# Altium PCB logi-cam.PcbDoc
Units mil, origin at the board's own origin, x right, y up, seen from the top; angles counter-clockwise.
Board outline 1699 x 1365 mil, 2 copper layers (Top Layer, Bottom Layer); 21 components, 23 nets, 97 pads, 28 vias.
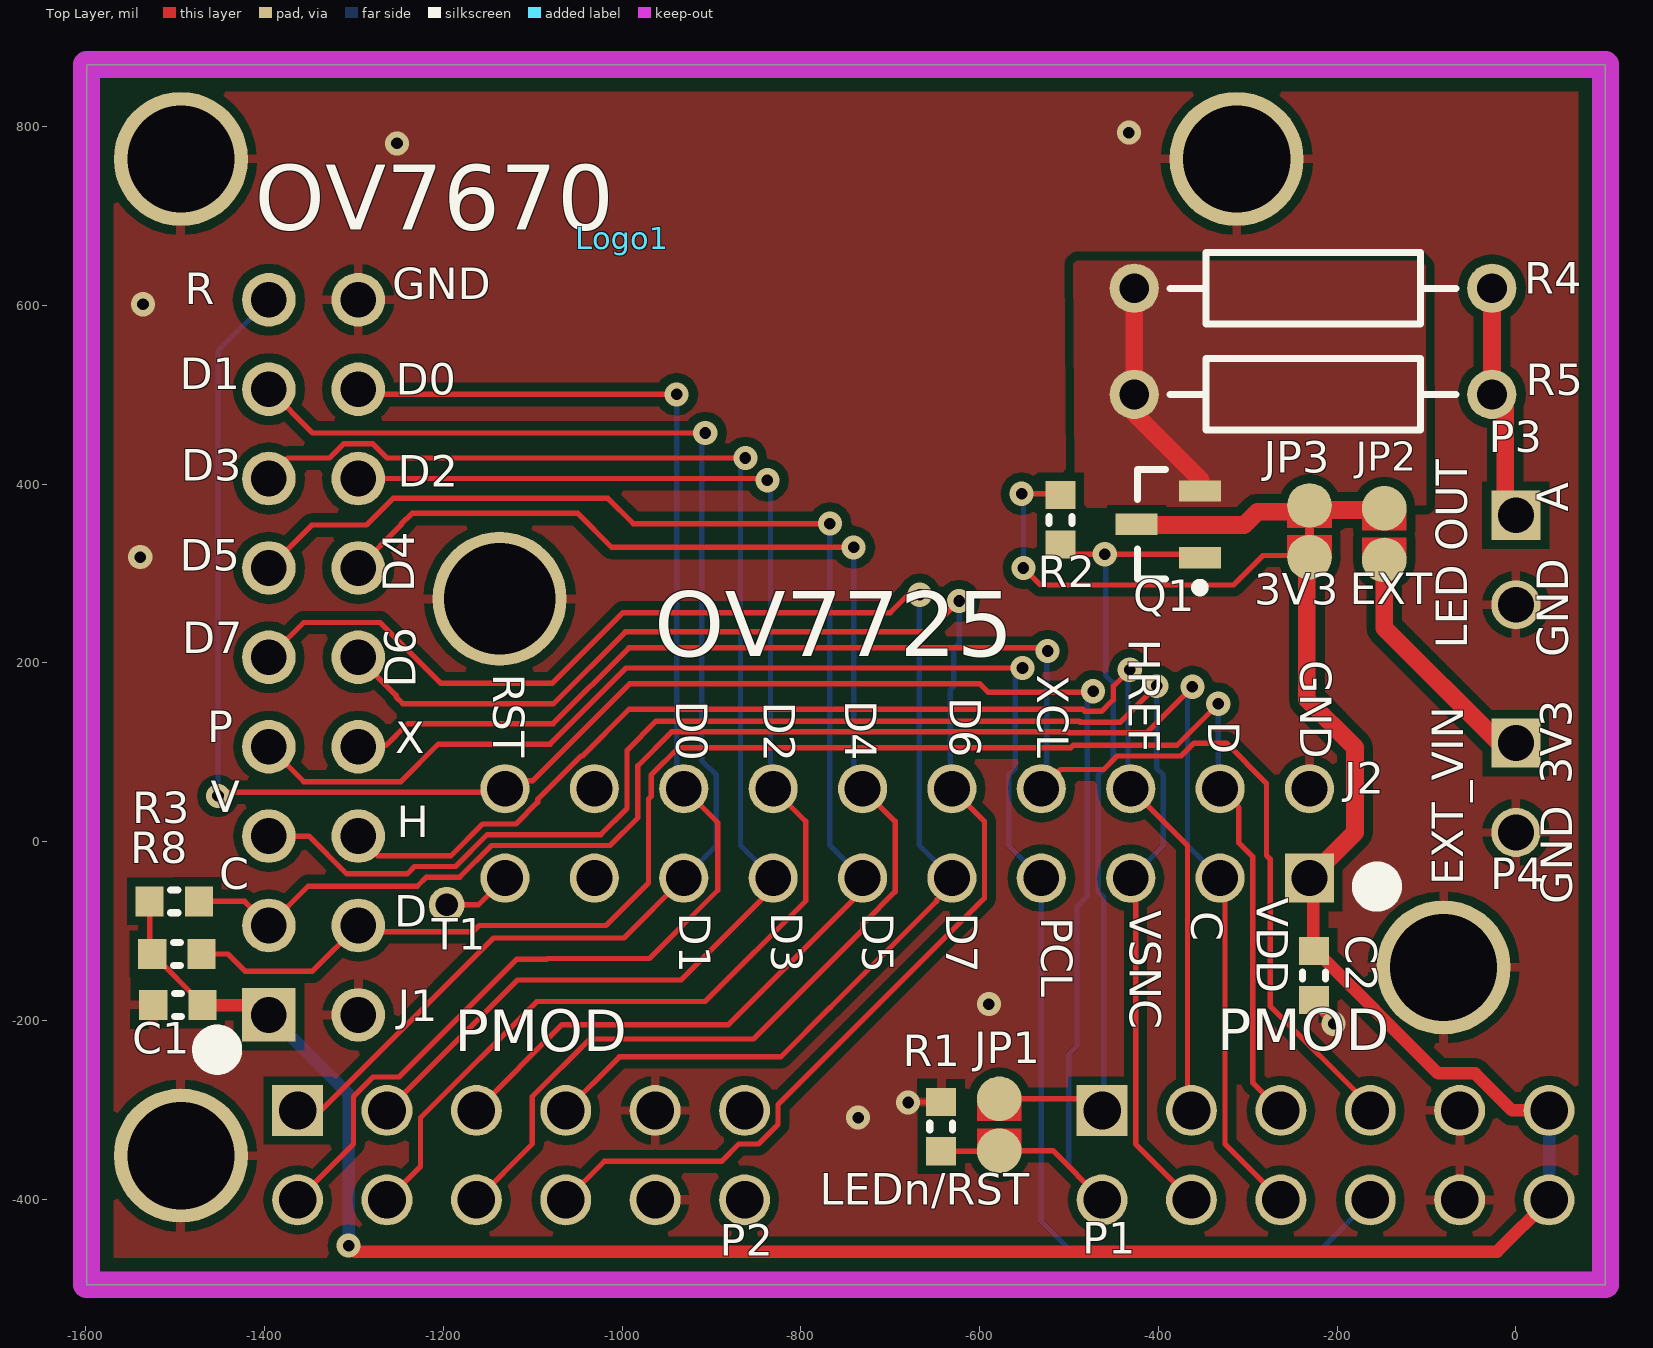
[diagram p0: Top Layer view]
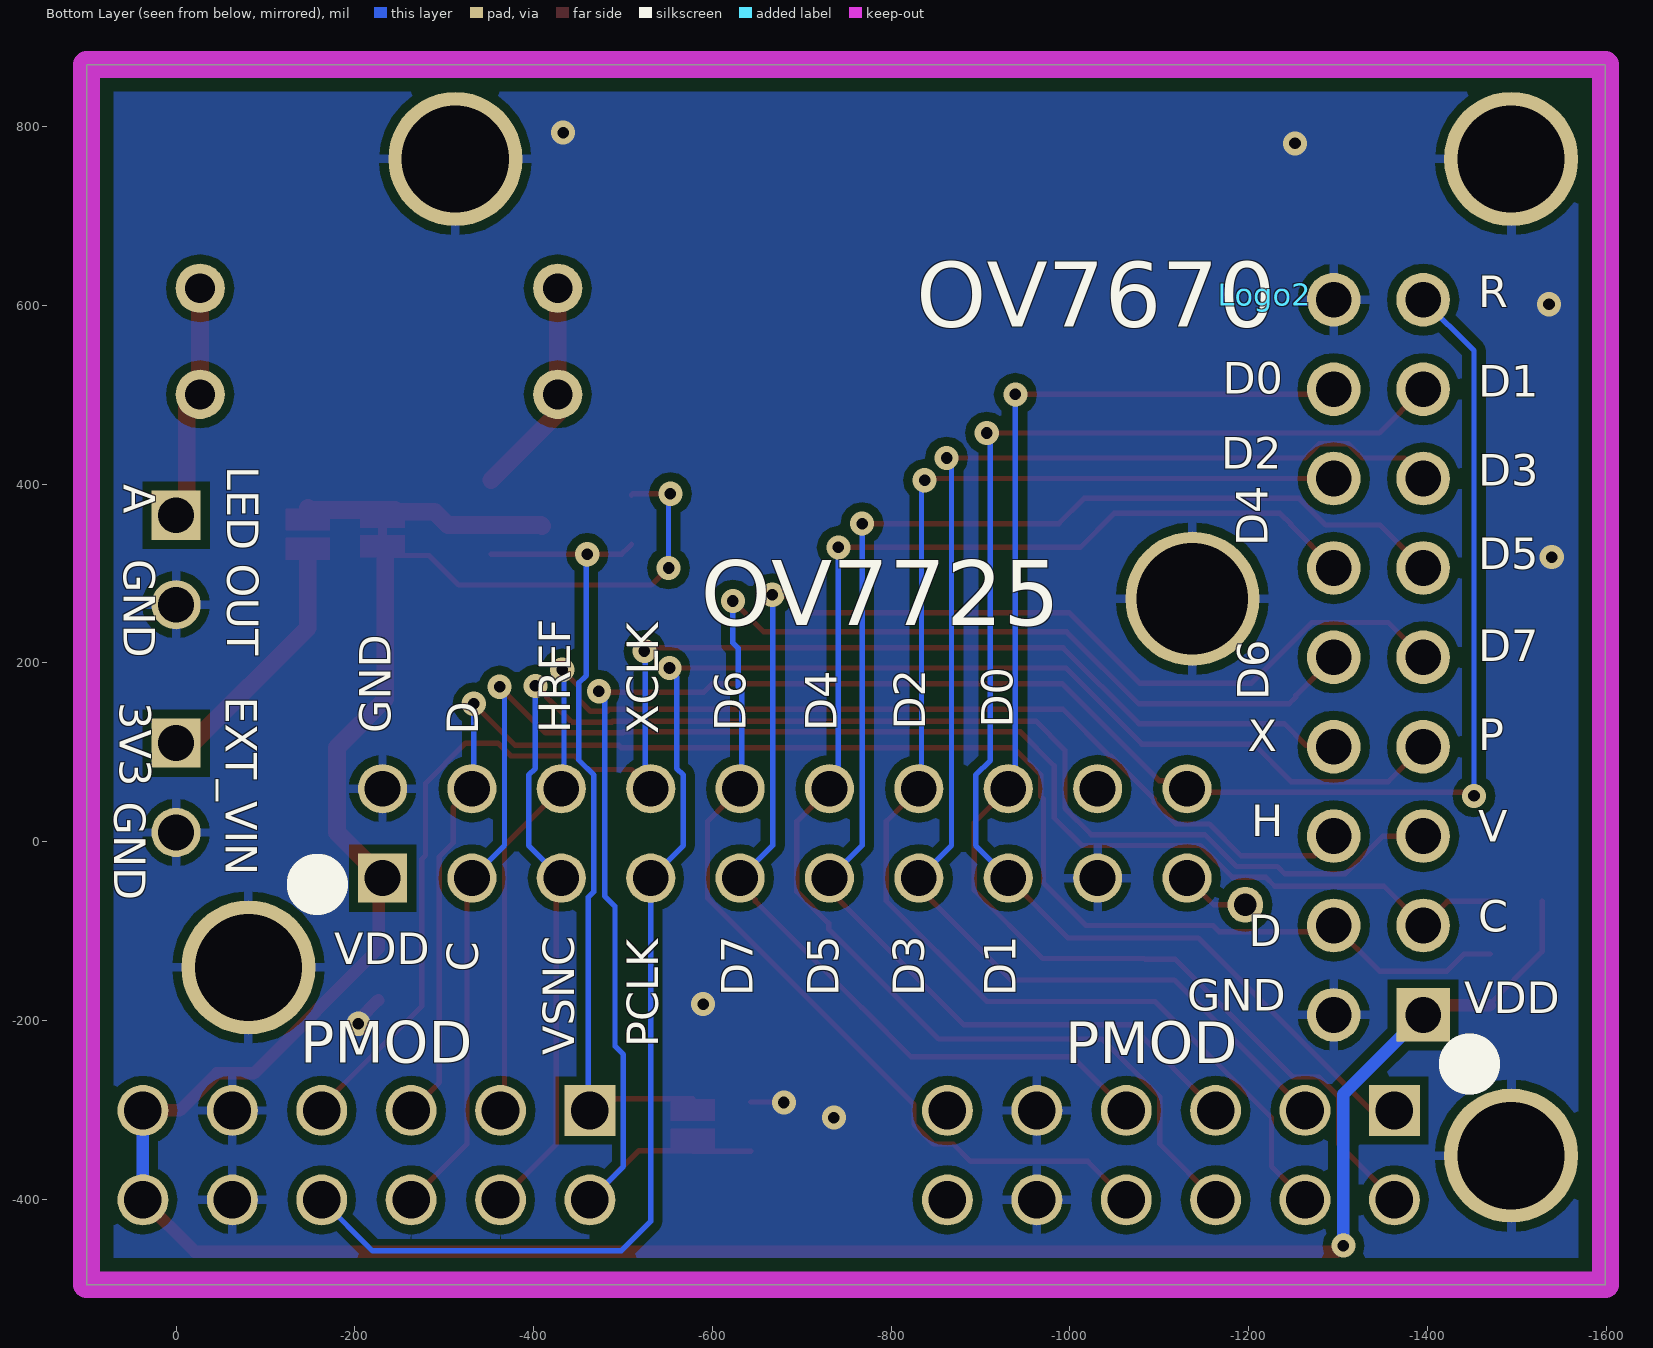
[diagram p1: Bottom Layer view, seen from below]
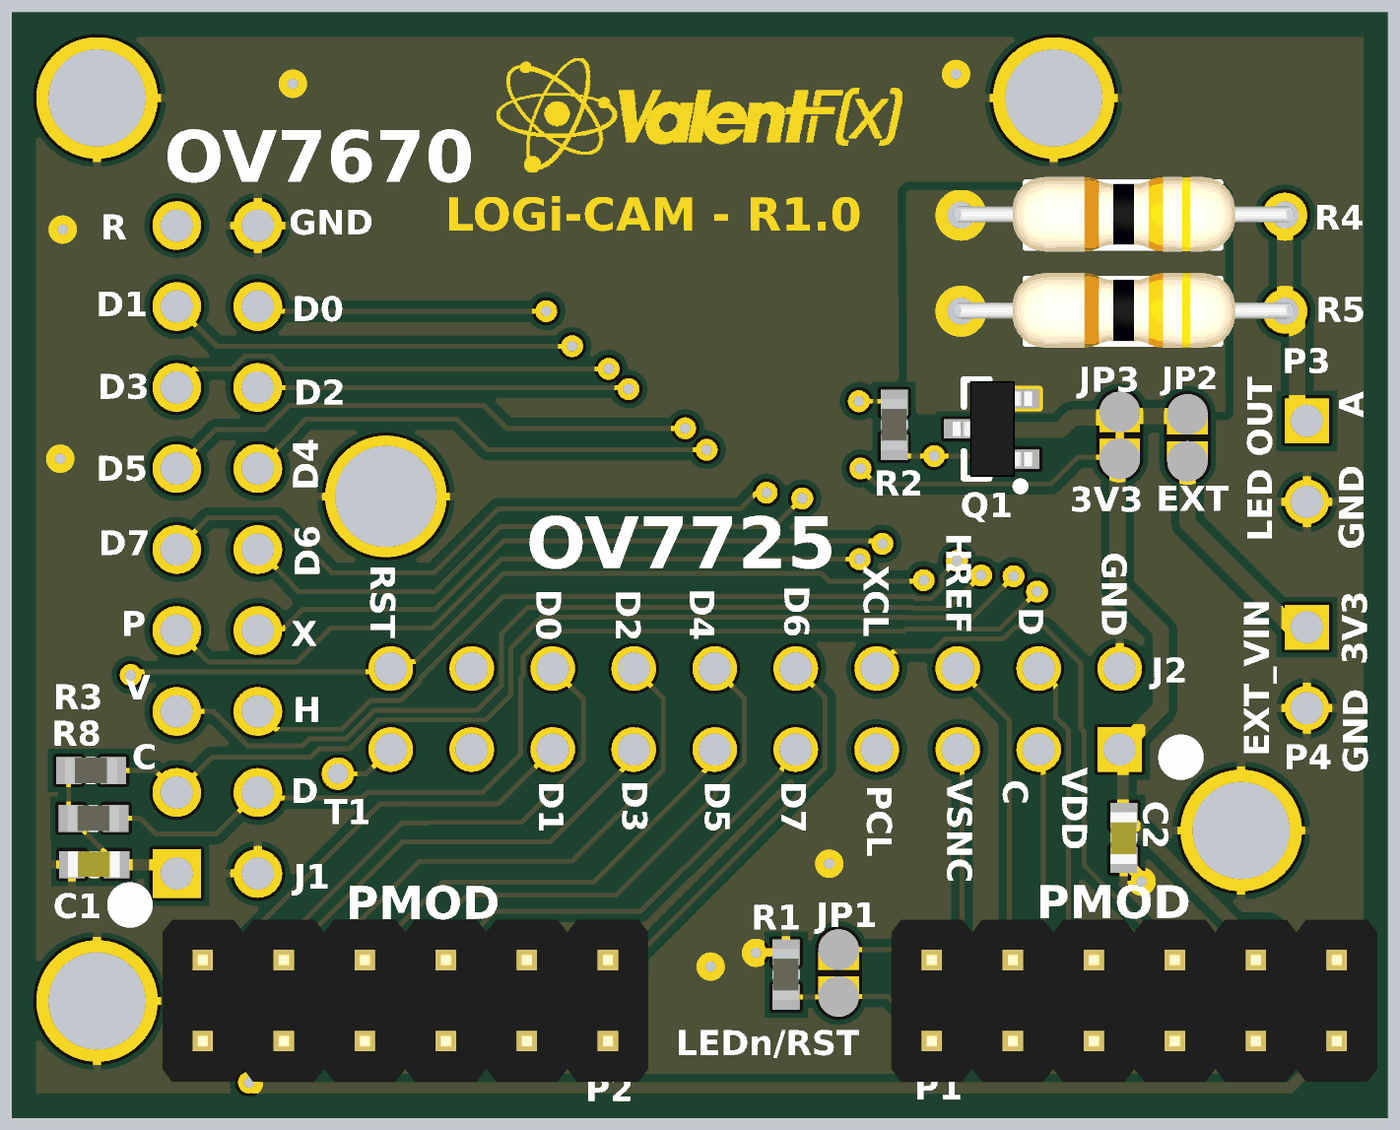
[diagram p2: 3D render of the assembled board from above, using the file's embedded part models]

## Layer stack, top to bottom
Top Solder: solder mask 0.4, Solder Resist, Dk 3.5
Top Layer: signal copper 1.4
Dielectric1: core 12.6, FR-4, Dk 4.8
Bottom Layer: signal copper 1.4
Bottom Solder: solder mask 0.4, Solder Resist, Dk 3.5

## Board outline
-1599,-495.83 100,-495.83 100,869.17 -1599,869.17

## Design rules (kind name [scope] priority, off if disabled: settings)
Clearance Keepout [onlayer('keep-out layer')] p1: gap=15
Clearance POLY_IN_BGA [(WithinRoom('BGA_INNER'))] p2: gap=6
Clearance POLY_TO_POLY [inpoly] p3: gap=10
Clearance [All] p4: gap=6
FabricationTestPointUsage TestPointUsage [All] p1: valid=0 allowmultiple=FALSE
FabricationTestpoint Testpoint [All] p1: side=3 testpointundercomponent=TRUE minsize=40 maxsize=100 preferedsize=60 minholesize=0 maxholesize=40 preferedholesize=32 testpointgrid=1 allowsidetop=TRUE allowsidebottom=TRUE usegrid=TRUE gridtolerance=0.01
PlaneClearance [All] p1: clearance=10
PolygonConnect POLY_Q [(ObjectKind = 'Poly') And (Name = 'Q_POUR')] p1: connectstyle=Direct reliefconductorwidth=10 reliefentries=4 polygonreliefangle="90 Angle" airgapwidth=10
PolygonConnect "via connect" [isvia] p2: connectstyle=Direct reliefconductorwidth=10 reliefentries=4 polygonreliefangle="90 Angle" airgapwidth=10
PolygonConnect [All] p3: connectstyle=Relief reliefconductorwidth=10 reliefentries=4 polygonreliefangle="90 Angle" airgapwidth=10
RoutingVias [All] p1: holewidth=13 width=27 viastyle="Through Hole" minholewidth=13 minwidth=27 maxholewidth=28 maxwidth=50
SilkToSolderMaskClearance SilkscreenOverComponentPads [IsPad] p1: minsilkscreentomaskgap=10 clearancetoexposedcopper=TRUE
SolderMaskExpansion VIA [isvia and not(locked)] p1: expansion=-100
SolderMaskExpansion SolderMaskExpansion_1 [All] p2: expansion=4
Width [All] p1: maxlimit=20 minlimit=6 preferedwidth=14
25 further rules are at their usual default settings.

## Classes and differential pairs
component class logi-cam-top: Cam1

## Components (designator, comment, footprint, x,y, rotation, side; value= is the part's Value field where it differs from the comment)
C1 ".1uF" C0603 -1497,-182.83 r180 top
C2 ".1uF" C0603 -226,-149.83 r270 top
J1 "OV7670 CAM HEADER" "HEADER_9x2_40_100 1-3-5 THRU DIP" -1395.16,-193.87 r90 top
J2 "OV7725 CAM HEADER" "HEADER_10x2_40_100 1-3-5 THRU DIP" -231,-40.83 r180 top locked
JP1 "Solder Jumper" SOLDER_JUMPER -578,-287.83 r90 top
JP2 "Solder Jumper" SOLDER_JUMPER -147.36,315 r270 top
JP3 "Solder Jumper-NC" SOLDER_JUMPER-NC -231,318 r270 top net-tie
Logo1 "Valent Logo 500" VALENTFX_500-SolderMask -1000,675 r0 top
Logo2 "Valent Logo 750" VALENTFX_750-SOLDERMASK-BOT -1217.7,612 r180 bottom
P1 "2X6 .1\" HEADER MALE" "PMOD HEADER - Male Vertical" -463,-300.83 r180 top
P2 "2X6 .1\" HEADER MALE" "PMOD HEADER - Male Vertical" -1363,-300.83 r180 top
P3 "Header2" "HEADER_2_40_100 THRU SIP" 0,365 r270 top
P4 "Header2" "HEADER_2_40_100 THRU SIP" 0,110.17 r270 top
Q1 "Si2347DS-T1-GE3" sot-23 -389,355 r180 top
R1 "10k" R0603 -643,-318.83 r90 top
R2 "10k" R0603 -509.5,360 r90 top
R3 "10k" R0603 -1501,-66.83 r0 top
R4 "Res2" AXIAL-0.4 -227,619 r0 top
R5 "10 Ohm 1/4W" AXIAL-0.4 -227,500.33 r0 top
R8 "10k" R0603 -1498,-125.83 r0 top
T1 "Test Point" "Tp 25-40" -1196.2,-70.68 r0 top

## Footprints (in the part's own frame and the unit in brackets; to place one, negate y for a bottom-side part, rotate by r counter-clockwise, add the part's x,y. Pads: shape width x height; smd on the part's side, far side on the other; paste and mask are expansions set on the pad)
AXIAL-0.4 [mm] "Axial Device, Thru-Hole; 2 Leads; 0.4 in Pin Spacing"
  round 1.4 hole 0.85: 1(-5.08,0) 2(5.08,0)
  silkscreen extent -4.06,-1.02 4.06,1.02, body extent -5.32,-1.14 5.37,1.19, height 2.44
C0603 [mm] "0603 Generic"
  rect 0.8x0.85 smd: 1(-0.7,0) 2(0.7,0)
  silkscreen extent -0.1,-0.33 0.1,0.33, body extent -0.8,-0.42 0.82,0.4, height 0.46
"HEADER_2_40_100 THRU SIP" [mil]
  rect 55x55 hole 40: 1(0,0)
  round 55 hole 40: 2(100,0)
"HEADER_9x2_40_100 1-3-5 THRU DIP" [mil]
  rect 60x60 hole 40: 1(0,0)
  round 60 hole 40: 2(0,-100) 3(100,0) 4(100,-100) 5(200,0) 6(200,-100) 7(300,0) 8(300,-100) 9(400,0) 10(400,-100) 11(500,0) 12(500,-100) 13(600,0) 14(600,-100) 15(700,0) 16(700,-100) 17(800,0) 18(800,-100)
"HEADER_10x2_40_100 1-3-5 THRU DIP" [mil]
  rect 55x55 hole 40: 1(0,0)
  round 55 hole 40: 2(0,-100) 3(100,0) 4(100,-100) 5(200,0) 6(200,-100) 7(300,0) 8(300,-100) 9(400,0) 10(400,-100) 11(500,0) 12(500,-100) 13(600,0) 14(600,-100) 15(700,0) 16(700,-100) 17(800,0) 18(800,-100) 19(900,0) 20(900,-100)
"PMOD HEADER - Male Vertical" [mil] "68021-212HLF"
  rect 57x57 hole 42: 1(0,0)
  round 57 hole 42: 2(-100,0) 3(-200,0) 4(-300,0) 5(-400,0) 6(-500,0) 7(0,100) 8(-100,100) 9(-200,100) 10(-300,100) 11(-400,100) 12(-500,100)
  body extent -550,-50 50,150, height 335
R0603 [mm] "0603 Generic"
  rect 0.8x0.85 smd: 1(-0.7,0) 2(0.7,0)
  silkscreen extent -0.1,-0.33 0.1,0.33, body extent -0.81,-0.41 0.81,0.41, height 0.46
SOLDER_JUMPER [mil]
  round 50 smd: 1(0,0) 2(-58,0)
  Top Layer region: 0.09,25.01 -24.91,25.01 -24.91,-24.99 0.09,-24.99
  Top Layer region: -32.91,25.01 -57.91,25.01 -57.91,-24.99 -32.91,-24.99
SOLDER_JUMPER-NC [mil]
  round 50 smd: 1(0,0) 2(-58,0)
  Top Layer region: 0.09,25 -24.91,25 -24.91,-25 0.09,-25
  Top Layer region: -32.91,25 -57.91,25 -57.91,-25 -32.91,-25
  Top Layer lines w10: 0,0 -50,0
sot-23 [mm] "SOT-23"
  rect 1.2x0.6 smd: 1(-0.9,0.95) 2(-0.9,-0.95) 3(0.9,0)
  silkscreen extent -1.03,-1.55 0.87,1.92, body extent -1.27,-1.5 1.23,1.5, height 1.07
"Tp 25-40" [mil]
  round 40 hole 25: 1(0,0)
VALENTFX_500-SolderMask [mil]
VALENTFX_750-SOLDERMASK-BOT [mil]

## Part data
C1 C2: library part "C0603 - C1608X7R1E104MT", ".10uF X7R 20% (MLCC) - SMD/SMT 0603 25volts"
J1: library part "CAM - OV7670", "CONN HEADER FMAL 18PS .1\" DL GOLD"
J2: library part "CAM - 0V7725", "CONN HEADR FMALE 20 POS .1\" DL AU"
JP1 JP2 JP3: "Solder/Configuration Jumper"
P1 P2: library part "P-MOD - PRPC006DAAN-RC", "CONN HEADER .100\" DUAL STR 12 POS"
P3 P4: "Header 2 pin"
Q1: library part "PMOS - Si2347DS-T1-GE3", "MOSFET -30V .042Ohm@10V 5A P-Ch G-III"
R1 R2 R3 R8: library part "R0603 - CRCW060310K0FKEA", "10k Thick Film Resistors - SMD 1/10watt 10Kohms 1%"
R4: "1/4W .4 Axial"
R5: library part "AX_25 - MF1/4DCT52R10R0F2", "Metal Film Resistors - Through Hole 10ohms 1% 100PPM"
T1: library part "Test Point 2", "Test Point Smaller Symbol"

## Free pads (board coordinates)
  round 150 hole 120: MT(-1493.58,-351.35) MT(-1493.58,763.61) MT(-312.48,763.61) MT(-81,-140.83)
  round 150 hole 125: MT(-1137,271.67)

## Via types
v1: diameter 27, hole 13, Top Layer to Bottom Layer, 28 vias

## Nets (pads, with @x,y where several pads share a name; then routed paths per layer and width w, separated by ;. In a path a pad name is that pad's centre, name@x,y a point inside that pad or via, vN(x,y) a via of type N, cw(c..) or ccw(c..) an arc to the next point about the centre after c; other vN are vias at no path point)
3V3: C1.1 C2.1 J1.1 J2.1 JP3.1 P1.6 P1.12 R2.2 R3.1 R8.1 | length 3256
  Top Layer w6: R3.1 -1528.56,-122.83 R8.1 -1469.44,-181.94 C1.1 ; v1(-553.01,389.17) -511.11,389.17 R2.2 ; v1(-551,306.13) -531.87,287 -316.13,287 -283.13,320 -234,320 -233,320 JP3.1
  Top Layer w14: C1.1 -1406.2,-182.83 J1.1 ; v1(-1306,-452) -1299.17,-458.83 -21,-458.83 P1.12 ; J2.1@-227,-61.83 -227,-119.28 -86.95,-259.33 -45.81,-259.33 -4.31,-300.83 P1.6
  Top Layer w20: JP3.1@-234,320 -234,159.17 -180,105.17 -180,10.17 J2.1
  Bottom Layer w6: v1(-553.01,389.17) -551,387.16 v1(-551,306.13)
  Bottom Layer w14: J1.1 -1394.58,-193.87 -1306,-282.44 v1(-1306,-452) ; P1.12 P1.6
CTL_CLK: J1.3 J2.3 P1.9 R3.2 | length 1887.7
  Top Layer w6: R3.2 -1422.2,-66.83 J1.3 -1351.29,-50 -1229.17,-50 -1219,-39.83 -1181.62,-39.83 -1146.12,-4.33 -1013.33,-4.33 -982.5,26.5 -982.5,84.67 -944.5,122.67 -501,122.67 -500,121.67 -413.5,121.67 v1(-362,173.17) ; J2.3 -325.5,-46.33 -325.5,-338.33 P1.9
  Bottom Layer w6: v1(-362,173.17) -367.5,167.67 -367.5,-4.33 J2.3
CTL_DATA: J1.4 J2.4 P1.3 R8.2 | length 1827.9
  Top Layer w6: R8.2 -1441.04,-125.83 -1421.87,-145 -1346.29,-145 J1.4 -1288.2,-100.83 -1166.99,-100.83 -1160.03,-93.87 -1018.23,-93.87 -970.5,-46.13 -970.5,47.43 -967.5,50.43 -967.5,74.29 -936.62,105.17 -498,105.17 -495.5,107.67 -379.5,107.67 v1(-333,154.17) ; J2.4 -310,38.17 -310,-1.42 -294.5,-16.92 -294.5,-269.33 P1.3
  Bottom Layer w6: v1(-333,154.17) -333,61.17 J2.4
D0: J1.16 J2.16 P2.7 | length 1576.9
  Top Layer w6: P2.7 -1300.5,-338.33 -1300.5,-285.29 -1278.53,-263.33 -1249.41,-263.33 -1117.91,-131.83 -1084.47,-131.83 -1083.47,-130.83 -969.38,-130.83 -893,-54.44 -893,21.17 J2.16 ; J1.16 -1289.35,500.33 v1(-939,500.33)
  Bottom Layer w6: v1(-939,500.33) -939,67.17 J2.16
D1: J1.15 J2.15 P2.1 | length 1569.7
  Top Layer w6: J1.15 -1346.16,457.13 v1(-907,457.13) ; P2.1 -1336.91,-300.83 -1143.91,-107.83 -998,-107.83 J2.15
  Bottom Layer w6: J2.15 -894.5,-4.33 -894.5,74.29 -911,90.79 -911,453.13 v1(-907,457.13)
D2: J1.14 J2.14 P2.8 | length 1585.7
  Top Layer w6: J1.14 -839.46,406.13 v1(-837.5,404.17) ; P2.8 -1225.5,-363.33 -1225.5,-308.95 -1095.37,-178.83 -907,-178.83 -794.5,-66.33 -794.5,22.67 J2.14
  Bottom Layer w6: v1(-837.5,404.17) -834,400.67 -834,62.17 J2.14
D3: J1.13 J2.13 P2.2 | length 1563.3
  Top Layer w6: -1374,429.17 -1327.27,429.17 -1311.31,445.13 -1279,445.13 -1263.04,429.17 v1(-862,429.17) ; P2.2 -1117,-154.83 -934,-154.83 -825.5,-46.33 J2.13
  Bottom Layer w6: v1(-862,429.17) -867.5,423.67 -867.5,-4.33 J2.13
D4: J1.12 J2.12 P2.9 | length 1646.2
  Top Layer w6: J1.12 -1247.12,354.17 -1247.12,355.06 -1235,367.17 -1049.53,367.17 -1011.53,329.17 v1(-741,329.17) ; P2.9 -1100.5,-338.33 -1100.5,-285.29 -1036.03,-220.83 -853,-220.83 -730,-97.83 -730,-91.44 -694.5,-55.94 -694.5,22.67 J2.12
  Bottom Layer w6: v1(-741,329.17) -741,69.17 J2.12
D5: J1.11 J2.11 P2.3 | length 1631.2
  Top Layer w6: J1.11 -1347.12,354.17 -1286,354.17 -1256.17,384 -1015.86,384 -987.53,355.67 v1(-767.5,355.67) ; P2.3 -1067,-204.83 -881,-204.83 -731,-54.83 J2.11
  Bottom Layer w6: v1(-767.5,355.67) -767.5,-4.33 J2.11
D6: J1.10 J2.10 P2.10 | length 1716.3
  Top Layer w6: J1.10 -1252.7,163.67 -1252.7,161.68 -1245.19,154.17 -1076.83,154.17 -996.33,234.67 -657.5,234.67 v1(-623,269.17) ; P2.10 -1019.97,-357.79 -888.97,-357.79 -869.5,-338.33 -847.47,-338.33 -825.5,-316.36 -825.5,-294.33 -594.5,-63.33 -594.5,22.67 J2.10
  Bottom Layer w6: J2.10 -633.03,61.2 -633.03,169.17 -629,173.2 -629,216.17 -623,222.17 v1(-623,269.17)
D7: J1.9 J2.9 P2.4 | length 1659.8
  Top Layer w6: J1.9 -1356.16,245.13 -1270.93,245.13 -1202.8,177 -1078.17,177 -999,256.17 -700,256.17 -680,276.17 v1(-667,276.17) ; P2.4 -1003,-240.83 -822.5,-240.83 -767.5,-185.83 -767.14,-185.83 -648,-66.69 -648,-64.83
  Bottom Layer w6: v1(-667,276.17) -667.5,275.67 -667.5,-4.33 J2.9
EXT_PWR: JP2.1 P4.1 | length 276.7
  Top Layer w20: JP2.1 -147.36,239.04 -18.5,110.17 P4.1
GND: C1.2 C2.2 J1.2 J1.18 J2.2 J2.17 P1.5 P1.11 P2.5 P2.11 P3.2 P4.2 pad.MT R1.2 | length 72.8
  Top Layer w6: v1(-680,-291.83) -679.44,-291.27 R1.2
  Top Layer w14: C2.2 -204,-199.39 v1(-204,-203.83)
  other v1: -736,-308.83 -589.59,-181.83 -1539,318.17 -1536,601.13 -1251.81,781.17 -433,793.17
HREF: J1.6 J2.6 P1.2 | length 1494.3
  Top Layer w6: J1.6 -1273.2,-15.83 -1191.56,-15.83 -1156.06,19.67 -1118.88,19.67 -1094.5,44.06 -1094.5,47.29 -1046.12,95.67 -1044.5,95.67 -992,148.17 -484.82,148.17 -482.32,145.67 -463.68,145.67 -450.5,158.85 -450.5,173.67 v1(-432,192.17) ; J2.6 -367.5,-4.33 -367.5,-296.33 P1.2
  Bottom Layer w6: v1(-432,192.17) -434,190.17 -434,62.17 J2.6
LED_DRIVE: JP1.1 P1.1 Q1.1 R2.1 | length 932.8
  Top Layer w6: JP1.1 -476,-287.83 P1.1 ; R2.1 -506.83,329.77 -498.56,321.5 v1(-460,321.5) Q1.1@-352.69,321.5
  Bottom Layer w6: P1.1 -461,-298.83 -461,-62.44 -467.5,-55.94 -467.5,74.29 -450.5,91.29 -450.5,177.49 -459,185.99 -459,328.77 v1(-460,321.5)
NetJ2_19: J2.19 T1.1 | length 77.6
  Top Layer w6: T1.1 -1160.86,-70.68 J2.19
NetJP2_2: JP2.2 JP3.2 Q1.3 | length 270.3
  Top Layer w20: Q1.3@-409.38,353 -408.38,354 -304.13,354 -289.13,369 -247,369 -245,371 -149.36,371 JP2.2
NetP3_1: P3.1 R4.2 R5.2 | length 265.2
  Top Layer w20: R4.2 R5.2 -12,485.33 -12,377 P3.1
NetQ1_2: Q1.2 R4.1 R5.1 | length 245.2
  Top Layer w20: R4.1 R5.1 -427,478.88 -352.69,404.58
PCLK: J1.7 J2.7 P1.10 | length 1960
  Top Layer w6: J1.7 -1356.16,67.13 -1247.54,67.13 -1205.67,109 -1080.56,109 -995.39,194.17 v1(-552,194.17) v1@-551,193.17
  Bottom Layer w6: v1(-552,194.17) -551,193.17 -560,184.17 -560,81.79 -567.5,74.29 -567.5,-4.33 J2.7 -531,-424.83 -498,-457.83 -220,-457.83 P1.10
RST: J1.17 J2.20 JP1.2 P1.7 R1.1 | length 2413
  Top Layer w6: v1(-1452,51.17) -1448.04,55.13 -1135.04,55.13 J2.20 -1122.19,67.98 -1100.02,67.98 -991.23,176.77 -600,176.77 -590.23,167 -474.17,167 v1(-473,168.17) ; R1.1 -578.56,-346.39 JP1.2 -518,-345.83 P1.7
  Bottom Layer w6: v1(-1452,51.17) -1452,549.29 J1.17 ; v1(-473,168.17) -479.5,161.67 -479.5,-60.92 -491,-72.42 -491,-228.83 -500.5,-238.33 -500.5,-363.33 P1.7
VSYNC: J1.5 J2.5 P1.8 | length 1757.9
  Top Layer w6: J1.5 -1350.31,6.13 -1308.18,-36 -1240.17,-36 -1232,-27.83 -1186.59,-27.83 -1151.09,7.67 -1024,7.67 -994.5,37.17 -994.5,102.06 -961.88,134.67 -488.29,134.67 -487.29,133.67 -442.5,133.67 v1(-402,174.17) ; J2.5 -425.5,-46.33 -425.5,-338.33 P1.8
  Bottom Layer w6: J2.5 -394.5,-4.33 -394.5,74.29 -402,81.79 v1(-402,174.17)
XCLK: J1.8 J2.8 P1.4 | length 1681.1
  Top Layer w6: J1.8 -1293.62,107.67 -1264.12,107.67 -1239.8,132 -1077.14,132 -992.47,216.67 -527.5,216.67 v1(-524,213.17) ; J2.8 -509.5,80.67 -461.12,80.67 -446.12,95.67 -374.53,95.67 -360.03,110.17 -324,110.17 -279,65.17 -279,-15.45 -275,-19.45 -275,-183.83 -163,-295.83 P1.4
  Bottom Layer w6: J2.8 -525,65.17 -525,212.17 v1(-524,213.17)
pads on no net: J2.18 P2.6 P2.12

## Polygon pours and split planes (outlines as drawn)
GND on Bottom Layer "GND_BOT" (solid, pour order 6): -1597,-495.83 -1597,859.17 94,859.17 94,-495.83
NetQ1_2 on Top Layer "Q_POUR" (solid, remove dead copper, pour order 4): -493.77,375 -493.19,375 -495.14,650 -110.6,650 -108.8,651.81 -101.17,644.19 -100.51,376 -494.51,372.91 -493.77,372.62 -494.47,375 -493.77,372.91
GND on Top Layer "GND_TOP" (solid, remove dead copper, pour order 5): -1599,-493.83 -1599,877.17 116.95,877.17 116.95,-493.83

## Keep-outs
Keep-Out Layer:
  the board outline again, w30

## Silkscreen, mask and mechanical layers (free items; w line width, h text height)
Top Overlay:
  circle w40: c-155.43,-50.35 r8.06
  circle w40: c-1453,-232.83 r8.06
  text "OV7670" at -1411,660.17 h125
  text "GND" at -1256.85,595.17 h60
  text "R" at -1489,589.17 h60
  text "D1" at -1495,494.17 h60
  text "D0" at -1253,488.17 h60
  text "D3" at -1493,392.17 h60
  text "D2" at -1251,385.17 h60
  text "A" at 70,369 h60 r90
  text "D5" at -1495,291.17 h60
  text "D4" at -1221,279.17 h60 r90
  text "EXT" at -186,254 h60
  text "3V3" at -293,253 h60
  text "HREF" at -445,227 h60 r270
  text "LED OUT" at -43,216 h60 r90
  text "GND" at 70,206 h60 r90
  text "GND" at -253,203 h60 r270
  text "D7" at -1492,199.17 h60
  text "RST" at -1156,187.67 h60 r270
  text "XCL" at -547.09,186.67 h60 r270
  text "OV7725" at -964,183.17 h125
  text "D6" at -1219,172.17 h60 r90
  text "D6" at -645,161.56 h60 r270
  text "D4" at -762,158.17 h60 r270
  text "D0" at -951.34,157.56 h60 r270
  text "D2" at -853.34,156.56 h60 r270
  text "D" at -356,134.67 h60 r270
  text "P" at -1464,99.52 h60
  text "X" at -1254,87.17 h60
  text "3V3" at 74,64 h60 r90
  text "V" at -1460,21 h60
  text "H" at -1252,-6.83 h60
  text "EXT_VIN" at -47,-49 h60 r90
  text "VDD" at -302,-63 h60 r270
  text "C" at -1450.59,-65 h60
  text "GND" at 75,-70 h60 r90
  text "VSNC" at -444,-76.83 h60 r270
  text "C" at -375,-78 h60 r270
  text "D3" at -845,-78.83 h60 r270
  text "D1" at -948,-79.83 h60 r270
  text "D5" at -743,-79.83 h60 r270
  text "D7" at -649,-79.83 h60 r270
  text "PCL" at -543,-84.83 h60 r270
  text "D" at -1255,-106.83 h60
  text "PMOD" at -334,-249 h80
  text "PMOD" at -1187,-250 h80
  text "LEDn/RST" at -779,-418 h60
Bottom Overlay:
  circle w60: c-158,-47.83 r4.12
  circle w60: c-1447,-248.83 r4.12
  text "R" at -1456.89,586.17 h60
  text "OV7670" at -828,552 h125
  text "D0" at -1171,489.17 h60
  text "D1" at -1456.89,486.17 h60
  text "LED OUT" at -45.81,420 h60 r90
  text "D2" at -1169.4,405.17 h60
  text "A" at 70,400 h60 r90
  text "D3" at -1456.89,386.17 h60
  text "D4" at -1233,330.17 h60 r270
  text "GND" at 70,316 h60 r90
  text "D5" at -1456.89,293.17 h60
  text "OV7725" at -587,218.17 h125
  text "D7" at -1456.89,190.17 h60
  text "EXT_VIN" at -44,162 h60 r90
  text "D6" at -1234,158.17 h60 r270
  text "3V3" at 75,156 h60 r90
  text "D0" at -948,127.2 h60 r270
  text "D2" at -850,125.2 h60 r270
  text "D4" at -751,123.2 h60 r270
  text "D6" at -649,123.2 h60 r270
  text "HREF" at -453,121.2 h60 r270
  text "GND" at -252,121.2 h60 r270
  text "XCLK" at -551,120.2 h60 r270
  text "D" at -350,119.43 h60 r270
  text "P" at -1456.89,90.17 h60
  text "X" at -1198.92,89.17 h60
  text "GND" at 80.78,44.72 h60 r90
  text "H" at -1202.97,-5.83 h60
  text "V" at -1456.89,-11.83 h60
  text "C" at -1456.89,-112.83 h60
  text "D" at -1200,-129 h60
  text "C" at -350,-145.83 h60 r270
  text "VDD" at -177,-148.83 h60
  text "D1" at -951,-172.83 h60 r270
  text "D3" at -849,-172.83 h60 r270
  text "D5" at -753,-172.83 h60 r270
  text "D7" at -657,-172.83 h60 r270
  text "GND" at -1131,-200.83 h60
  text "VDD" at -1441,-203.83 h60
  text "PCLK" at -551,-229.83 h60 r270
  text "VSNC" at -456.99,-238.84 h60 r270
  text "PMOD" at -139,-262.83 h80
  text "PMOD" at -995,-263.83 h80
Top Solder:
  text "LOGi-CAM - R1.0" at -1063.76,600 h80
Bottom Solder:
  text "LOGi-CAM- R1.0" at -503,497 h60
  text "V2014.03.16" at -499.48,444 h80
Mechanical 2:
  lines w10: -1764.13,-449.72 -1745,-510 ; -1755,-509.86 -1735,-510.15 ; -1745.87,809.47 -1725,869.17 ; -1740.6,-206.25 -1745,-510 ; -1735,869.32 -1715,869.03 ; -1729.4,565.43 -1725,869.17 ; -1724.13,-450.3 -1745,-510 ; -1705.87,808.89 -1725,869.17 ; -1604.15,-599.01 -1604.02,-579.01 ; -1544.22,-609.4 -1604.09,-589.01 ; -1543.96,-569.4 -1604.09,-589.01 ; -1132.92,-592.05 -1604.09,-589.01 ; -371.17,-596.96 100,-600 ; 39.87,-619.61 100,-600 ; 40.13,-579.61 100,-600 ; 99.94,-610 100.06,-590
  text "1379.319 (mil)" at -1704.46,-196.78 h60 r89.17
  text "1704.121 (mil)" at -1123.15,-628.1 h60 r359.63
Mechanical 3:
  lines w20: -4259.96,152 -1859.96,152 ; -4259.96,2252 4690.04,2252
  text "PCB Fabrication Notes" at -4239.96,2372 h150
  text "Unless otherwise specified, all dimensions are in inches" at -4271,2052 h100
  text "Overall Dimension:  1.7\"  x  1.4\"" at -4271,1952 h100
  text "Finished Thickness:  .062\"" at -4271,1852 h100
  text "Layer Count: 2" at -4271,1752 h100
  text "Min Thru Hole: 13 mil" at -4271,1663 h100
  text "Annular Ring: 7 mil" at -4271,1570 h100
  text "Min Trace/Space: 6 mil" at -4271,1475 h100
  text "Drill Count:" at -4271,1369 h100
  text ".hole_Count" at -3675.96,1369 h100
  text "PAD Count:" at -4271,1269 h100
  text ".pad_Count" at -3675.96,1269 h100
  text "Component Count:" at -4271,1169 h100
  text ".Component_Count" at -3475.96,1169 h100
  text "Via Count:" at -4271,1069 h100
  text ".Via_Count" at -3675.96,1069 h100
  text "Plating: Gold ENIG" at -4271,847.73 h100
  text "Solder Mask:  Black" at -4271,748 h100
  text "Legend:  White Non-Conductive Ink LPI Process" at -4271,648 h100
  text "RS274-X Gerber Format, 2.5 Leading Zeros Suppressed" at -4271,548 h100
  text "Excellon Drill Format, 2.5 Trailing Zeros Suppressed" at -4271,448 h100
  text "Layer Details" at -4259.96,252 h100
  text "4-Layer Stackup" at -3459.96,252 h100
  text "POLARITY" at -2559.96,252 h100
  text ".GTL - Top Copper" at -4259.96,52 h100
  text "POSITIVE" at -2559.96,52 h100
  text ".G1 - Inner Copper (Ground)" at -4259.96,-48 h100
  text "POSITIVE" at -2559.96,-48 h100
  text ".G2 - Inner Copper (VDD)" at -4259.96,-148 h100
  text "POSITIVE" at -2559.96,-148 h100
  text ".GBL - Bottom Copper" at -4259.96,-248 h100
  text "POSITIVE" at -2561,-248.46 h100
  text ".GTO - Top Silkscreen" at -4259.96,-448 h100
  text ".GBO - Bottom Silkscreen" at -4259.96,-548 h100
  text ".GTP - Top Solder Paste" at -4259.96,-648 h100
  text ".GBP - Bottom Solder Paste" at -4259.96,-748 h100
  text ".GTS -  Top Solder Mask" at -4259.96,-848 h100
  text ".GBS - Bottom Solder Mask" at -4259.96,-948 h100
  text ".GKO - Board Outline" at -4259.96,-1048 h100
  text ".GM1 - 3D Part Bodies - System" at -4259.96,-1148 h100
  text ".GM2 - Board Dimensions" at -4259.96,-1248 h100
  text ".GM3 - Single Board Fabrication Notes" at -4259.96,-1348 h100
  text ".GM4 - Single Board Score/Tab Route" at -4259.96,-1448 h100
  text ".GM13 - 3D Body Alt" at -4259.96,-1548 h100
  text ".GM15 - Assembly Outlines - Top" at -4259.96,-1648 h100
  text ".GM20 - Panel Dimensions" at -4259.96,-1748 h100
  text ".GM21 - Panel Score/Tab Route" at -4259.96,-1848 h100
  text ".GM22 - Panel Dimensions" at -4259.96,-1948 h100
  text ".TXT/.DRL - NC-Drill" at -4259.96,-2148 h100
Mechanical 16:
  lines w5: -6461,-1795.83 -6261,-1795.83 ; -6461,979.17 -6261,979.17 ; -6461,3754.17 -6261,3754.17 ; -4521,-4570.83 -4521,-4370.83 ; -4521,6329.17 -4521,6529.17 ; -2586,-4570.83 -2586,-4370.83 ; -2586,6329.17 -2586,6529.17 ; -651,-4570.83 -651,-4370.83 ; -651,6329.17 -651,6529.17 ; 1289,-4570.83 1289,-4370.83 ; 1289,6329.17 1289,6529.17 ; 3224,-4570.83 3224,-4370.83 ; 3224,6329.17 3224,6529.17 ; 4339,-4070.83 8839,-4070.83 ; 4339,-3770.83 8839,-3770.83 ; 5159,-4570.83 5159,-4370.83 ; 5159,6329.17 5159,6529.17 ; 5839,-4370.83 5839,-3770.83 5839,-3470.83 4339,-3470.83 4339,-4370.83 ; 7099,-4570.83 7099,-4370.83 ; 7099,6329.17 7099,6529.17 ; 7939,-4370.83 7939,-3770.83 ; 8839,-3470.83 2939,-3470.83 2939,-4370.83 4339,-4370.83 ; 8839,-3170.83 8839,-4370.83 ; 8839,-1795.83 9039,-1795.83 ; 8839,979.17 9039,979.17 ; 8839,3754.17 9039,3754.17 ; 4339,-4370.83 8839,-4370.83 ; 8839,-4370.83 8839,6329.17 -6261,6329.17 -6261,-4370.83 8839,-4370.83 ; -6461,-4570.83 9039,-4570.83 9039,6529.17 -6461,6529.17 -6461,-4570.83
  text "1" at -5514.66,6394.17 h60
  text "2" at -3584,6394.17 h60
  text "3" at -1644.66,6394.17 h60
  text "4" at 296,6394.17 h60
  text "5" at 2236,6394.17 h60
  text "6" at 4166,6394.17 h60
  text "7" at 6116,6394.17 h60
  text "8" at 8046,6394.17 h60
  text "A" at -6386,5056.17 h60
  text "A" at 8914,5056.17 h60
  text "B" at -6386,2276.17 h60
  text "B" at 8914,2276.17 h60
  text "C" at -6386,-503.83 h60
  text "C" at 8914,-503.83 h60
  text "D" at -6386,-3263.83 h60
  text "D" at 8914,-3263.83 h60
  text "PCB DESIGNER:" at 4389,-3565.83 h60
  text "TITLE:" at 5939,-3570.83 h60
  text "Michael Jones" at 4454,-3700.83 h60
  text "Group VIII Technology" at 3179,-3800.83 h60
  text "DATE:" at 4389,-3870.83 h60
  text "PART NO.:" at 5889,-3870.83 h60
  text "REV:" at 7989,-3870.83 h60
  text "1652 W 820 N" at 3179,-3900.83 h60
  text ".PRINT_DATE" at 4439,-3990.83 h60
  text "Provo, UT 84601" at 3179,-4000.83 h60
  text "801/379-0118" at 3179,-4100.83 h60
  text "FILE NAME:" at 4389,-4170.83 h60
  text "DWG NO:" at 5889,-4170.83 h60
  text "SCALE:" at 7989,-4170.83 h60
  text ".PCB_FILE_NAME_NO_PATH" at 4439,-4290.83 h60
  text "1" at -5514.66,-4505.83 h60
  text "2" at -3584,-4505.83 h60
  text "3" at -1644.66,-4505.83 h60
  text "4" at 296,-4505.83 h60
  text "5" at 2236,-4505.83 h60
  text "6" at 4166,-4505.83 h60
  text "7" at 6116,-4505.83 h60
  text "8" at 8046,-4505.83 h60